# EAGLE board n64-usb (EAGLE 6.1)
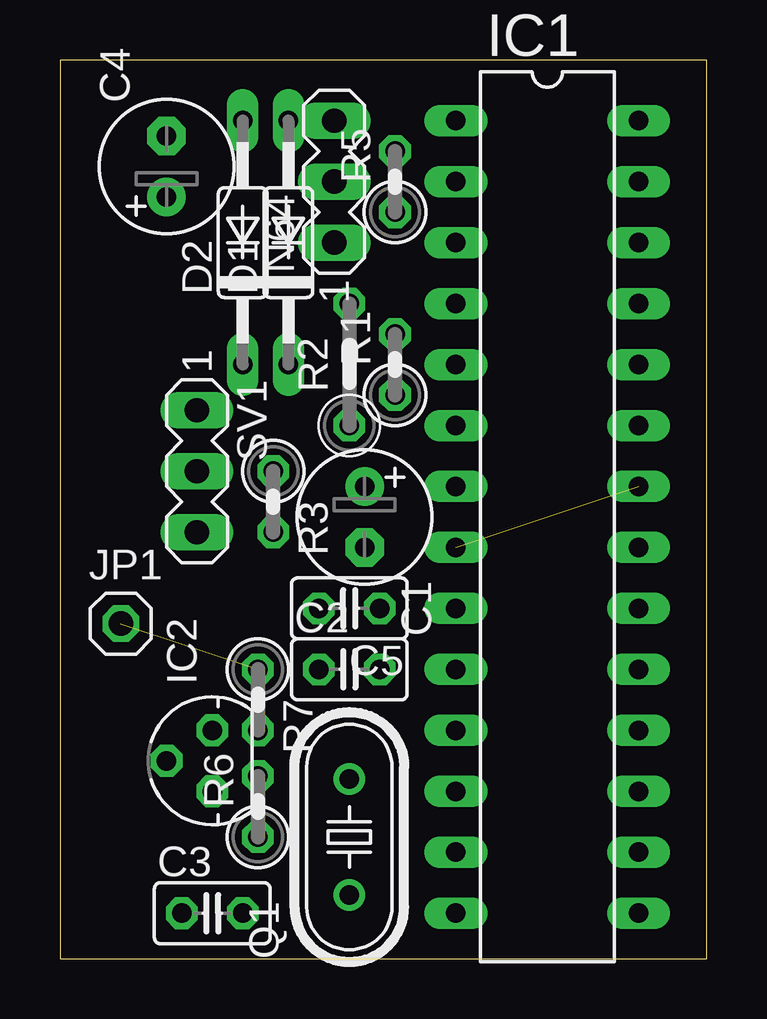
[diagram p0: board, top side]
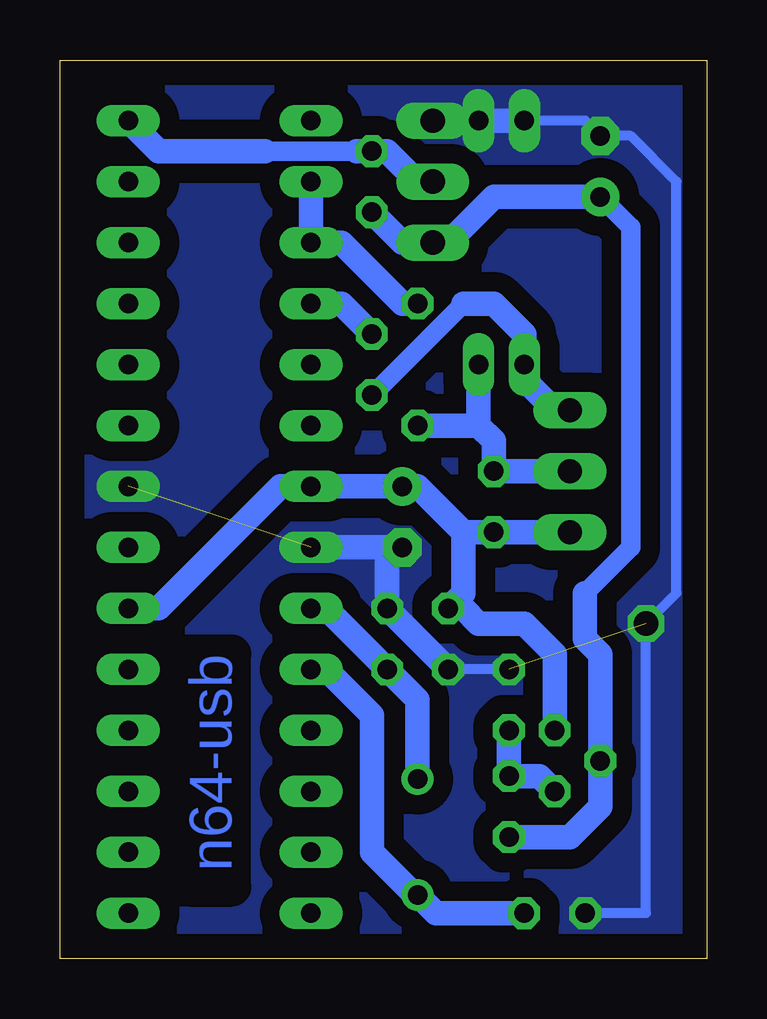
[diagram p1: board, bottom side, seen from below]

Size 26.98 x 37.45 mm. Coordinates in mm from the lower left corner, seen from the top.
Outline: 0,0 26.98,0 26.98,37.45 0,37.45 0,0
Copper layers (1*16): Top 0.035mm / dielectric 1.5mm / Bottom 0.035mm
Design rules: minimum track width 10mil, minimum drill 24mil, track to track 8mil, track to pad 8mil, pad to pad 8mil, via to via 8mil, smd to smd 8mil, copper to edge 40mil, drill to drill 8mil, minimum pad ring 10mil, minimum via ring 8mil, stop-mask expansion 4mil, vias tented up to drill 0mil, thermal gap 10mil

## Footprints (pad centres in the part's own frame; a part is rotated, then mirrored left to right if it is on the bottom)
E2,5-6 = drill 0.813 pad 1.6: + -1.27,0 | drill 0.813 pad 1.6 octagon: - 1.27,0
C025-025X050 = drill 0.813 octagon: 1 -1.27,0; 2 1.27,0
DO35-10 = drill 0.813 long: A 5.08,0; C -5.08,0
DIL28-3 = drill 0.813 long: 1 -16.51,-3.81; 2 -13.97,-3.81; 3 -11.43,-3.81; 4 -8.89,-3.81; 5 -6.35,-3.81; 6 -3.81,-3.81; 7 -1.27,-3.81; 8 1.27,-3.81; 9 3.81,-3.81; 10 6.35,-3.81; 11 8.89,-3.81; 12 11.43,-3.81; 13 13.97,-3.81; 14 16.51,-3.81; 15 16.51,3.81; 16 13.97,3.81; 17 11.43,3.81; 18 8.89,3.81; 19 6.35,3.81; 20 3.81,3.81; 21 1.27,3.81; 22 -1.27,3.81; 23 -3.81,3.81; 24 -6.35,3.81; 25 -8.89,3.81; 26 -11.43,3.81; 27 -13.97,3.81; 28 -16.51,3.81
317L = drill 0.813 octagon: 1 -1.27,0; 2 0,1.905; 3 1.27,0
1X01 = drill 1.016 octagon: 1 0,0
MA03-1 = drill 1.016 long: 1 -2.54,0; 2 0,0; 3 2.54,0
HC49U-V = drill 0.813: 1 -2.413,0; 2 2.413,0
0207/2V = drill 0.813 octagon: 1 -1.27,0; 2 1.27,0
0207/5V = drill 0.813 octagon: 1 -2.54,0; 2 2.54,0

## Placement (x,y rotation side)
C1  10u  [E2,5-6]  12.7,18.41 270 top
C2  27p  [C025-025X050]  12.06,12.07 0 top
C3  27p  [C025-025X050]  6.35,1.9 0 top
C4  22u  [E2,5-6]  4.45,33.02 90 top
C5  100n  [C025-025X050]  12.06,14.61 180 top
D1  3V6  [DO35-10]  9.53,29.84 90 top
D2  3V6  [DO35-10]  7.62,29.84 90 top
IC1  MEGA8-P  [DIL28-3]  20.32,18.41 270 top
IC2  LM317  [317L]  6.35,8.26 90 top
JP1  [1X01]  2.54,13.97 0 top
N64  [MA03-1]  11.43,32.38 90 top
Q1  12Mhz  [HC49U-V]  12.06,5.08 90 top
R1  68R  [0207/2V]  13.97,24.77 90 top
R2  68R  [0207/5V]  12.06,24.77 90 top
R3  1K5  [0207/2V]  8.89,19.05 270 top
R5  1K  [0207/2V]  13.97,32.38 90 top
R6  330R  [0207/2V]  8.26,6.35 90 top
R7  560R  [0207/2V]  8.26,10.79 270 top
SV1  [MA03-1]  5.71,20.32 270 top

## Library data of the parts
C1-C5 R1-R3 R5-R7 = rcl
D1 D2 = diode
IC1 = atmel
IC2 = v-reg
JP1 = pinhead
N64 SV1 = con-lstb
Q1 = crystal

## Nets
+3V3: C4.+ IC2.2 N64.1 R5.1 R6.1
+5V: C1.+ C5.2 IC1.7 IC1.20 IC2.3 R3.2 SV1.3
DATA: IC1.28 N64.2 R5.2
GND: C1.- C2.1 C3.1 C4.- C5.1 D1.A D2.A IC1.8 IC1.22 JP1.1 N64.3 R7.1
N$1: C3.2 IC1.10 Q1.1
N$2: C2.2 IC1.9 Q1.2
N$4: IC1.4 R1.2
N$6: IC1.2 IC1.3 R2.2
N$8: D2.C R1.1 SV1.1
N$9: D1.C R2.1 R3.1 SV1.2
N$11: IC2.1 R6.2 R7.2

## Tracks (layer width: path | path; a pad name or v marks a point on that pad's centre or on a via)
+3V3
  Bottom 0.813: C4.+ 3.17,30.48 3.17,17.14 5.08,15.24
  Bottom 1.016: R5.1 12.7,29.84 N64.1 10.79,29.84 8.89,31.75 C4.+ | R6.1 5.71,5.08 4.45,6.35 IC2.2 4.45,9.53 4.45,12.7 5.08,13.34 5.08,15.24
+5V
  Bottom 1.016: 10.16,17.78 10.79,18.41 12.06,19.68 C1.+ IC1.7 17.78,19.68 22.86,14.61 IC1.20 | 9.53,17.78 R3.2 SV1.3 | 10.16,17.78 9.53,17.78 | 10.16,17.78 9.53,17.78 | 10.16,17.78 10.16,15.24 C5.2 10.16,14.61 9.53,13.97 8.26,13.97 7.62,13.97 6.35,12.7 6.35,12.07 IC2.3
DATA
  Bottom 0.813: 14.61,33.65 18.41,33.65
  Bottom 1.016: IC1.28 22.86,33.65 22.23,33.65 18.41,33.65 | 14.61,33.65 R5.2 13.34,33.65 12.06,32.38 N64.2
GND  (2 unrouted)
  Bottom 0.406: C3.1 2.54,1.9 JP1.1 1.27,15.24 1.27,32.38 3.17,34.29 C4.- 5.08,34.92 D2.A | R7.1 C2.1
  Bottom 1.016: 13.34,17.14 C1.- | 13.34,17.14 IC1.8 | C2.1 C5.1 13.34,17.14 | N64.3 D1.A D2.A
  pour Bottom (isolate 0.813, no thermals): 0,37.46 27.3,37.46 27.3,0 0,0
N$1
  Bottom 1.016: Q1.1 12.06,2.54 | Q1.1 12.19,2.67 13.97,4.45 13.97,10.16 15.88,12.07 IC1.10 | C3.2 11.3,1.9 Q1.1
N$2
  Bottom 1.016: IC1.9 15.88,14.61 C2.2 12.06,10.79 Q1.2
N$4
  Bottom 1.016: R1.2 15.24,27.3 IC1.4
N$6
  Bottom 1.016: IC1.2 IC1.3 15.24,29.84 14.61,29.21 12.7,27.3 R2.2
N$8
  Bottom 0.813: 10.16,27.3 R1.1
  Bottom 1.016: 7.62,24.13 D2.C | 7.62,24.13 7.62,26.04 8.89,27.3 10.16,27.3 | SV1.1 6.35,22.86 7.62,24.13
N$9
  Bottom 1.016: SV1.2 R3.1 8.89,21.59 9.53,22.23 | 9.53,22.23 R2.1 | 9.53,22.23 D1.C
N$11
  Bottom 1.016: IC2.1 6.99,7.62 R6.2 R7.2

## Text on the board
Bottom: n64-usb